# Altium PCB PCBDesign.PcbDoc
Units mm, origin at the board's own origin, x right, y up, seen from the top; angles counter-clockwise.
Board outline 60 x 50 mm, 2 copper layers (Top Layer, Bottom Layer); 10 components, 6 nets, 31 pads, 0 vias.
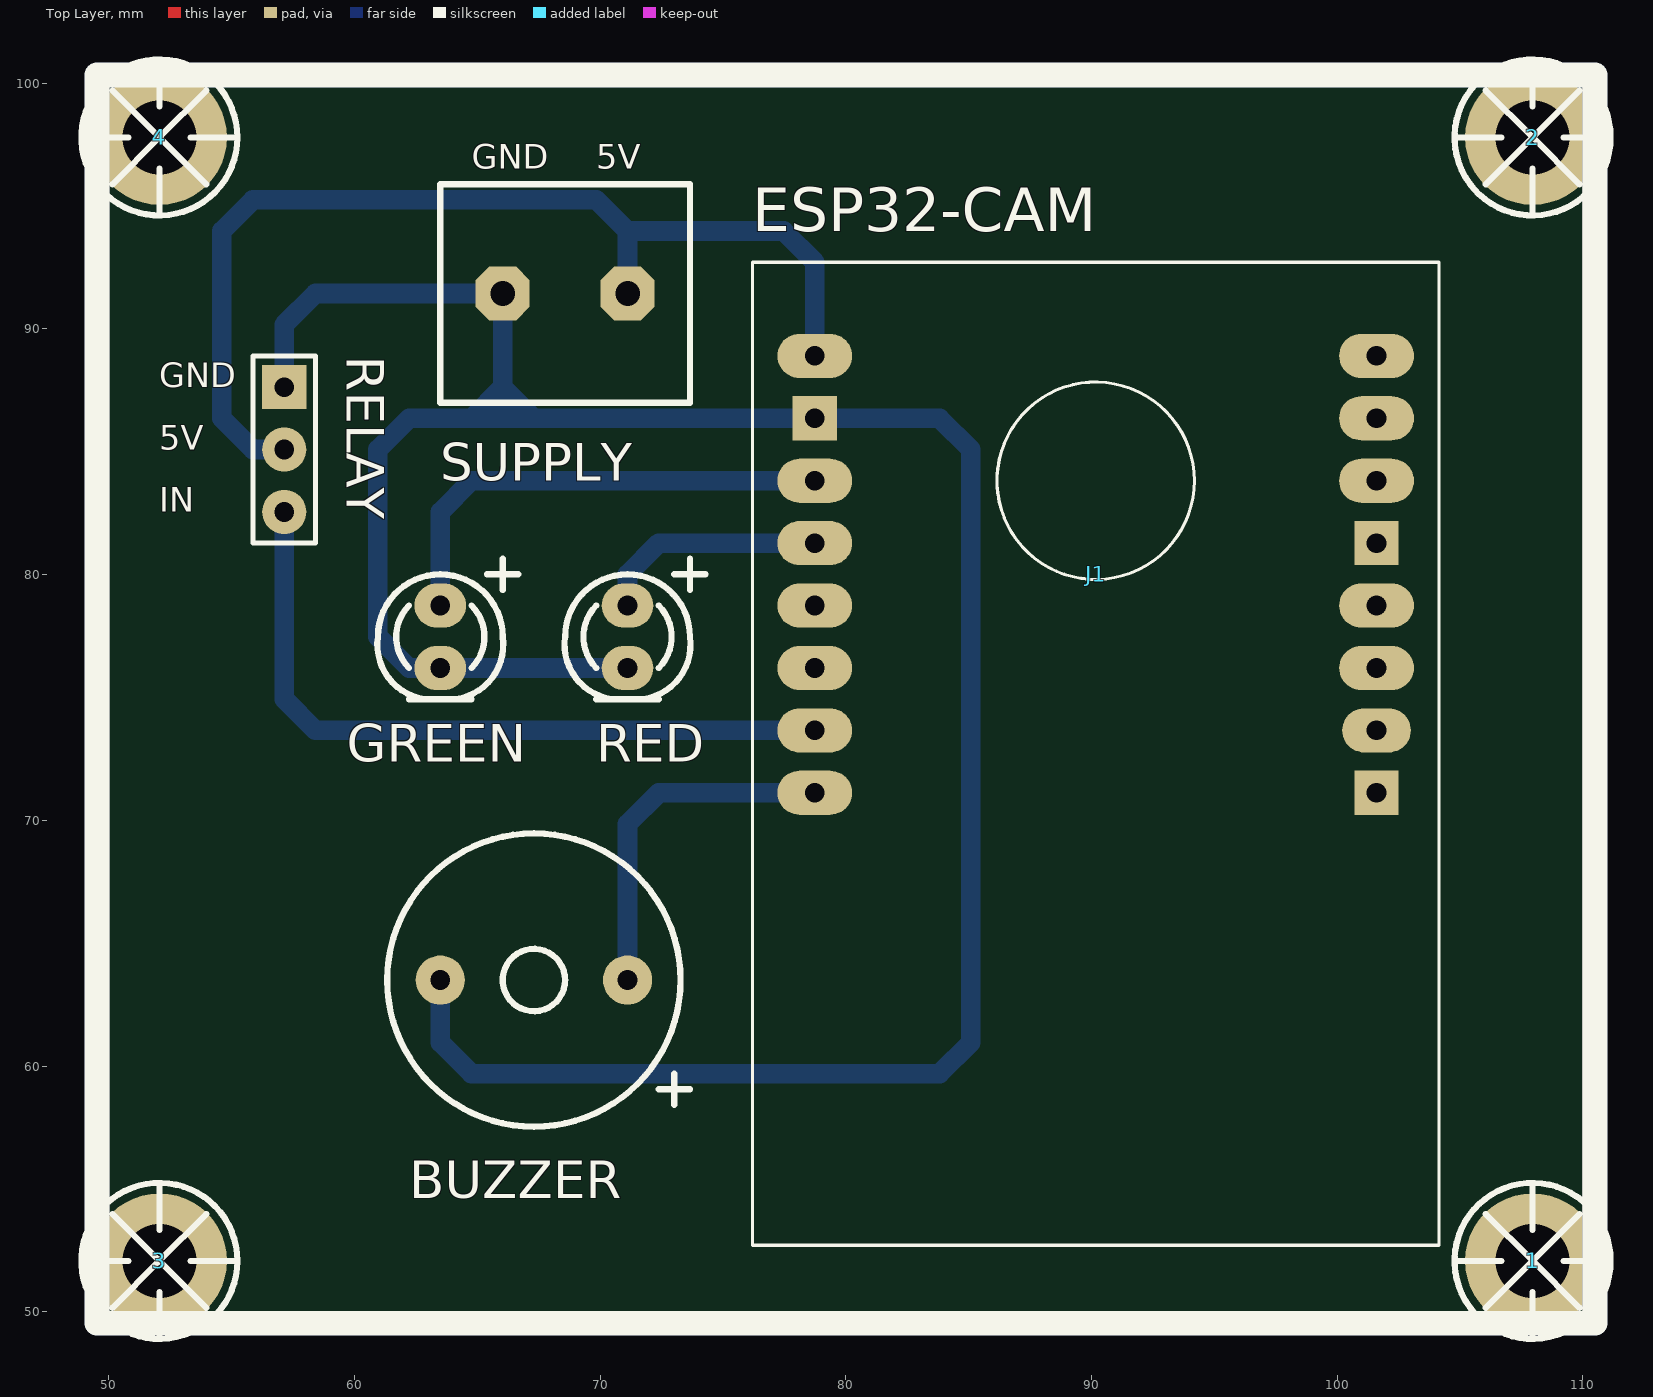
[diagram p0: Top Layer view]
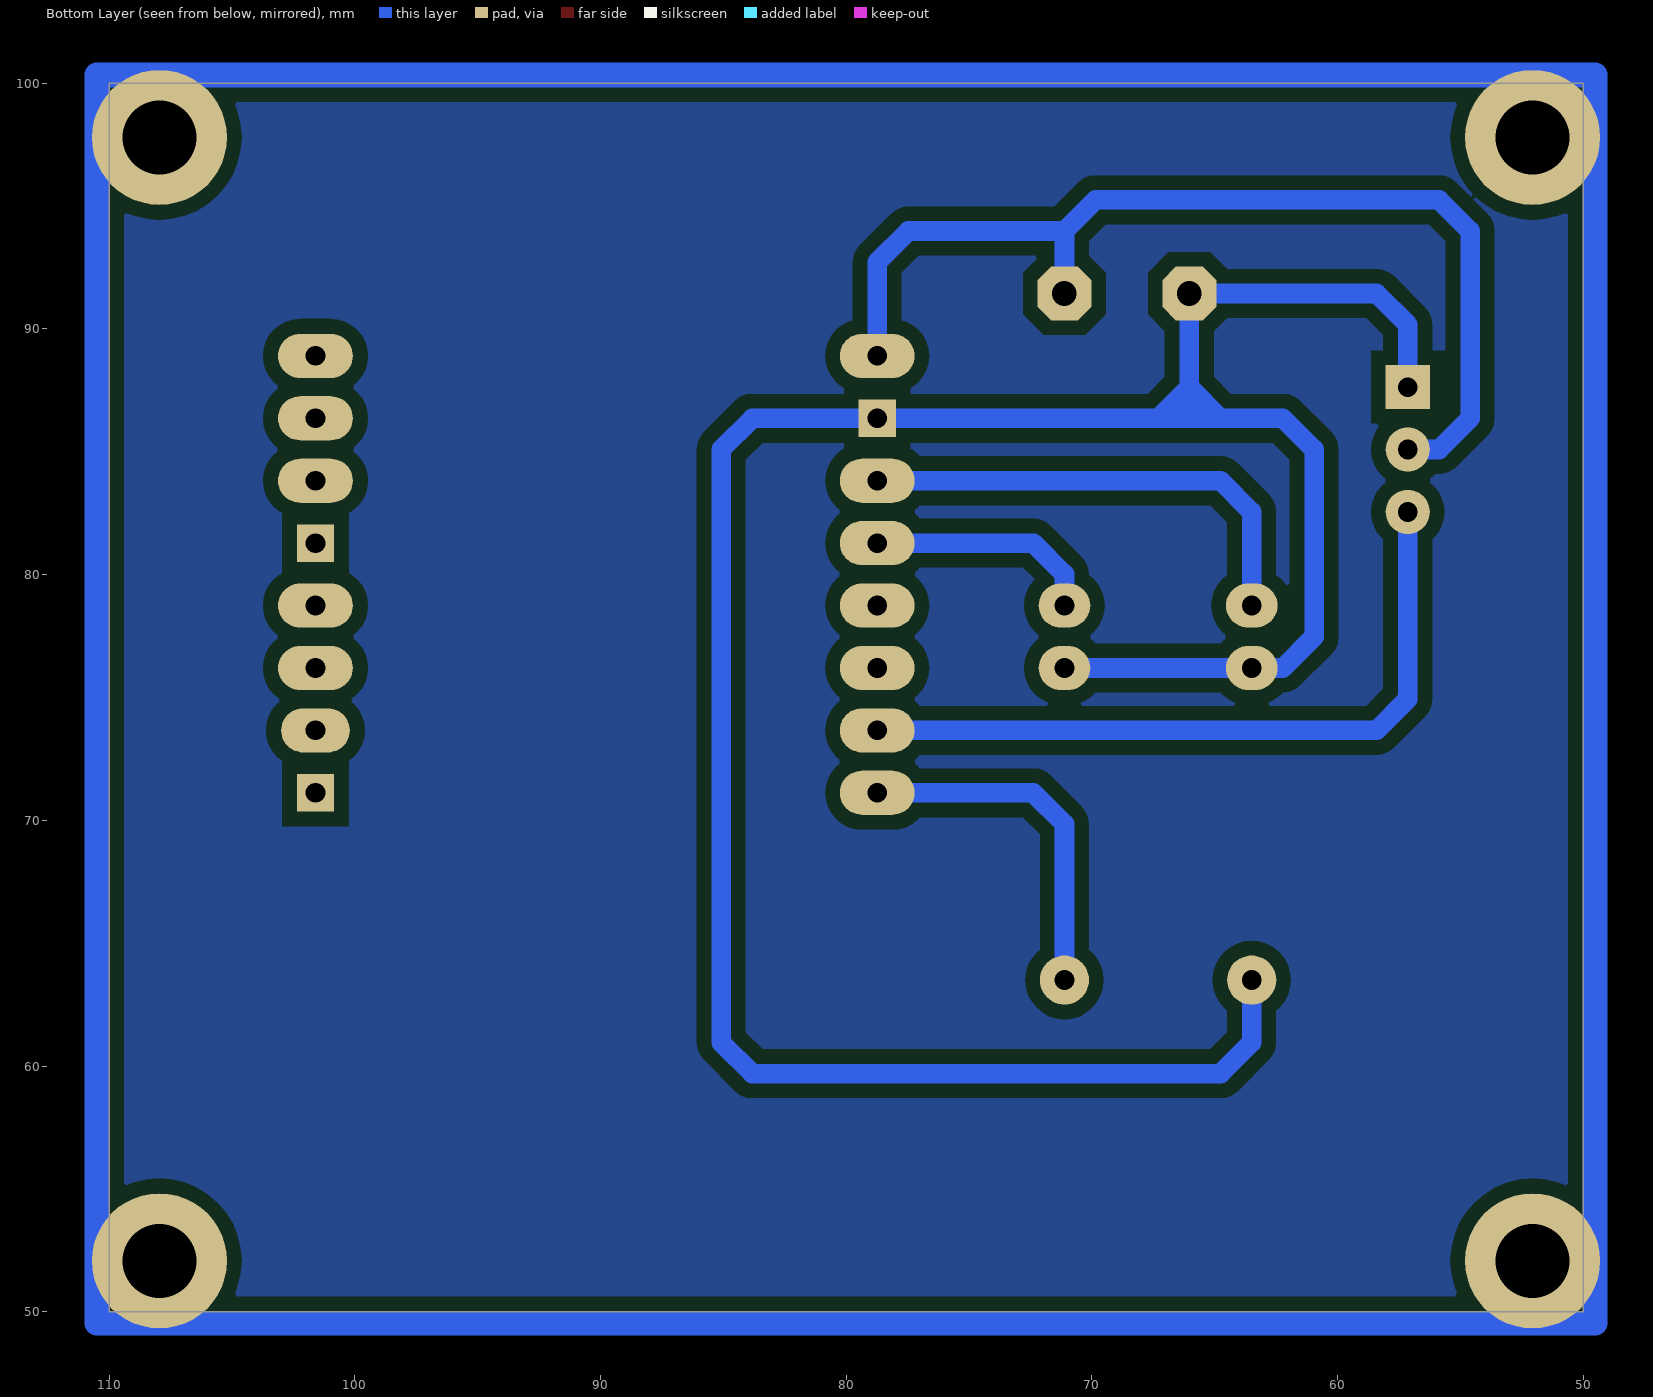
[diagram p1: Bottom Layer view, seen from below]

## Layer stack, top to bottom
Top Solder: solder mask 0.0102, Solder Resist, Dk 3.5
Top Layer: signal copper 0.0356
Dielectric 1: dielectric 0.32, FR-4, Dk 4.8
Bottom Layer: signal copper 0.0356
Bottom Solder: solder mask 0.0102, Solder Resist, Dk 3.5

## Board outline
50,100 110,100 110,50 50,50 50,100

## Design rules (kind name [scope] priority, off if disabled: settings)
Clearance [All] p1: gap=0.6
PolygonConnect [All] p1: connectstyle=Relief reliefconductorwidth=0.254 reliefentries=4 polygonreliefangle="90 Angle" airgapwidth=0.254
RoutingLayers [All] p1: top layer_v5=FALSE bottom layer_v5=TRUE
RoutingVias [All] p1: holewidth=0.711 width=1.27 viastyle="Through Hole" minholewidth=0.711 minwidth=1.27 maxholewidth=0.711 maxwidth=1.27
SolderMaskExpansion [All] p1: expansion=0.102
Width [All] p1: maxlimit=1 minlimit=0.6 preferedwidth=0.8
29 further rules are at their usual default settings.

## Components (designator, comment, footprint, x,y, rotation, side; value= is the part's Value field where it differs from the comment)
1 "Spacer" Spacer 107.95,52.07 r90 top
2 "Spacer" Spacer 107.95,97.79 r90 top
3 "Spacer" Spacer 52.07,52.07 r90 top
4 "Spacer" Spacer 52.07,97.79 r90 top
BUZZER "Buzzer" BUZZER 67.31,63.5 r180 top (schematic designator LS1)
GREEN "LED-G" LED 63.5,78.74 r270 top (schematic designator D1)
J1 "ESP32-CAM" ESP32-CAM 90.17,78.74 r180 top
RED "LED-R" LED 71.12,78.74 r270 top (schematic designator D2)
RELAY "RELAY" HDR1X3 57.15,87.63 r270 top (schematic designator P1)
SUPPLY "SUPPLY" "Term.Block 2pin" 68.58,91.44 r0 top (schematic designator P2)

## Footprints (in the part's own frame and the unit in brackets; to place one, negate y for a bottom-side part, rotate by r counter-clockwise, add the part's x,y. Pads: shape width x height; smd on the part's side, far side on the other; paste and mask are expansions set on the pad)
BUZZER [mm]
  round 2 hole 0.8: 1(-3.81,0) 2(3.81,0)
  silkscreen extent -6.35,-5.97 5.97,5.97
ESP32-CAM [mm]
  rect 1.8x1.8 / inner round 1.524 / far side rect 1.524x1.524 hole 0.8: P$1(-11.43,7.62) P$5(-11.43,-2.54) P$10(11.43,-7.62)
  oval 2.8x1.8 hole 0.8: P$2(-11.43,5.08)
  oval 3.048x1.8 hole 0.8: P$3(-11.43,2.54) P$4(-11.43,0) P$6(-11.43,-5.08) P$7(-11.43,-7.62) P$8(-11.43,-10.16) P$9(11.43,-10.16) P$11(11.43,-5.08) P$12(11.43,-2.54) P$13(11.43,0) P$14(11.43,2.54) P$15(11.43,5.08) P$16(11.43,7.62)
  silkscreen extent -13.97,-13.97 13.97,26.04
HDR1X3 [mm] "Connector; Header; 3 Position"
  rect 1.8x1.8 hole 0.8: 1(0,0)
  round 1.8 hole 0.8: 2(2.54,0) 3(5.08,0)
  silkscreen extent -1.27,-1.27 6.35,1.27
LED [mm] "SMT LED; 2 Flat Leads"
  oval 1.8x2.1 hole 0.8: 1(0,0) 2(2.54,0)
  silkscreen extent -1.91,-2.56 3.81,3.17
Spacer [mm]
  round 5.5 hole 3: 0(0,0)
  silkscreen extent -3.17,-3.17 3.17,3.17
"Term.Block 2pin" [mm]
  oct 2.2x2.2 hole 1: 0(-2.54,0) 1(2.54,0)
  silkscreen extent -5.08,-4.44 5.08,4.44

## Part data
BUZZER: "Magnetic Transducer Buzzer"
GREEN RED: library part LED, "LED 3mm or 5mm"
J1: "ESP32 ESP32 Transceiver; 802.11 a/b/g/n (Wi-Fi, WiFi, WLAN), Bluetooth® Smart 4.x Low Energy (BLE) Evaluation Board"
RELAY: library part "Header 3", "Header, 3-Pin"
SUPPLY: library part "Terminal Block 2pin", "Terminal Block, 2-Pin"

## Nets (pads, with @x,y where several pads share a name; then routed paths per layer and width w, separated by ;. In a path a pad name is that pad's centre, name@x,y a point inside that pad or via, vN(x,y) a via of type N, cw(c..) or ccw(c..) an arc to the next point about the centre after c; other vN are vias at no path point)
BUZZER: BUZZER.1 J1.P$16 | length 14.5
  Bottom Layer w0.8: BUZZER.1 71.12,69.85 72.39,71.12 J1.P$16
GND: BUZZER.2 GREEN.2 J1.P$10 RED.2 RELAY.1 SUPPLY.0 | length 113.4
  Bottom Layer w0.8: RELAY.1 57.15,90.17 58.42,91.44 SUPPLY.0 66.04,87.63 ; BUZZER.2 63.5,60.96 64.77,59.69 83.82,59.69 85.09,60.96 85.09,85.09 83.82,86.36 J1.P$10 67.31,86.36 ; RED.2 GREEN.2 62.23,76.2 60.96,77.47 60.96,85.09 62.23,86.36 64.77,86.36 ; 64.77,86.36 66.04,87.63 ; 64.77,86.36 66.04,86.36 ; 66.04,86.36 66.04,87.63 ; 66.04,86.36 67.31,86.36 ; 66.04,87.63 67.31,86.36
LED-G: GREEN.1 J1.P$11 | length 19.6
  Bottom Layer w0.8: GREEN.1 63.5,82.55 64.77,83.82 J1.P$11
LED-R: J1.P$12 RED.1 | length 9.4
  Bottom Layer w0.8: RED.1 71.12,80.01 72.39,81.28 J1.P$12
RELAY: J1.P$15 RELAY.3 | length 29.7
  Bottom Layer w0.8: RELAY.3 57.15,74.93 58.42,73.66 J1.P$15
VCC: J1.P$9 RELAY.2 SUPPLY.1 | length 42.7
  Bottom Layer w0.8: RELAY.2 55.88,85.09 54.61,86.36 54.61,93.98 55.88,95.25 69.85,95.25 71.12,93.98 ; SUPPLY.1 71.12,93.98 ; J1.P$9 78.74,92.71 77.47,93.98 71.12,93.98
pads on no net: 1.0 2.0 3.0 4.0 J1.P$1 J1.P$2 J1.P$3 J1.P$4 J1.P$5 J1.P$6 J1.P$7 J1.P$8 J1.P$13 J1.P$14
copper on no net: | length 223.5
  Bottom Layer w1: 49.53,49.53 49.53,100.33 110.49,100.33 110.49,49.53 49.53,49.53

## Polygon pours and split planes (outlines as drawn)
no net on Bottom Layer "Top Layer-No Net" (solid, pour order 4): 49.53,100.33 49.53,49.53 110.49,49.53 110.49,100.33 49.53,100.33

## Silkscreen, mask and mechanical layers (free items; w line width, h text height)
Top Overlay:
  lines w1: 49.53,49.53 49.53,100.33 110.49,100.33 110.49,49.53 49.53,49.53
  text "GND" at 64.77,96.52 h1
  text "5V" at 69.85,96.52 h1
  text "GND" at 52.07,87.63 h1
  text "5V" at 52.07,85.09 h1
  text "IN" at 52.07,82.55 h1